# Altium PCB BioZ.PcbDoc (part 2 of 3)
Units mm, origin at the board's own origin, x right, y up, seen from the top; angles counter-clockwise.
Board outline 88 x 75 mm, 4 copper layers (Top Layer, GND1, GND 2, Bottom Layer), stack 1.564 mm thick; 175 components, 112 nets, 533 pads, 354 vias.
Unrouted connection lines stored in the file: 5.
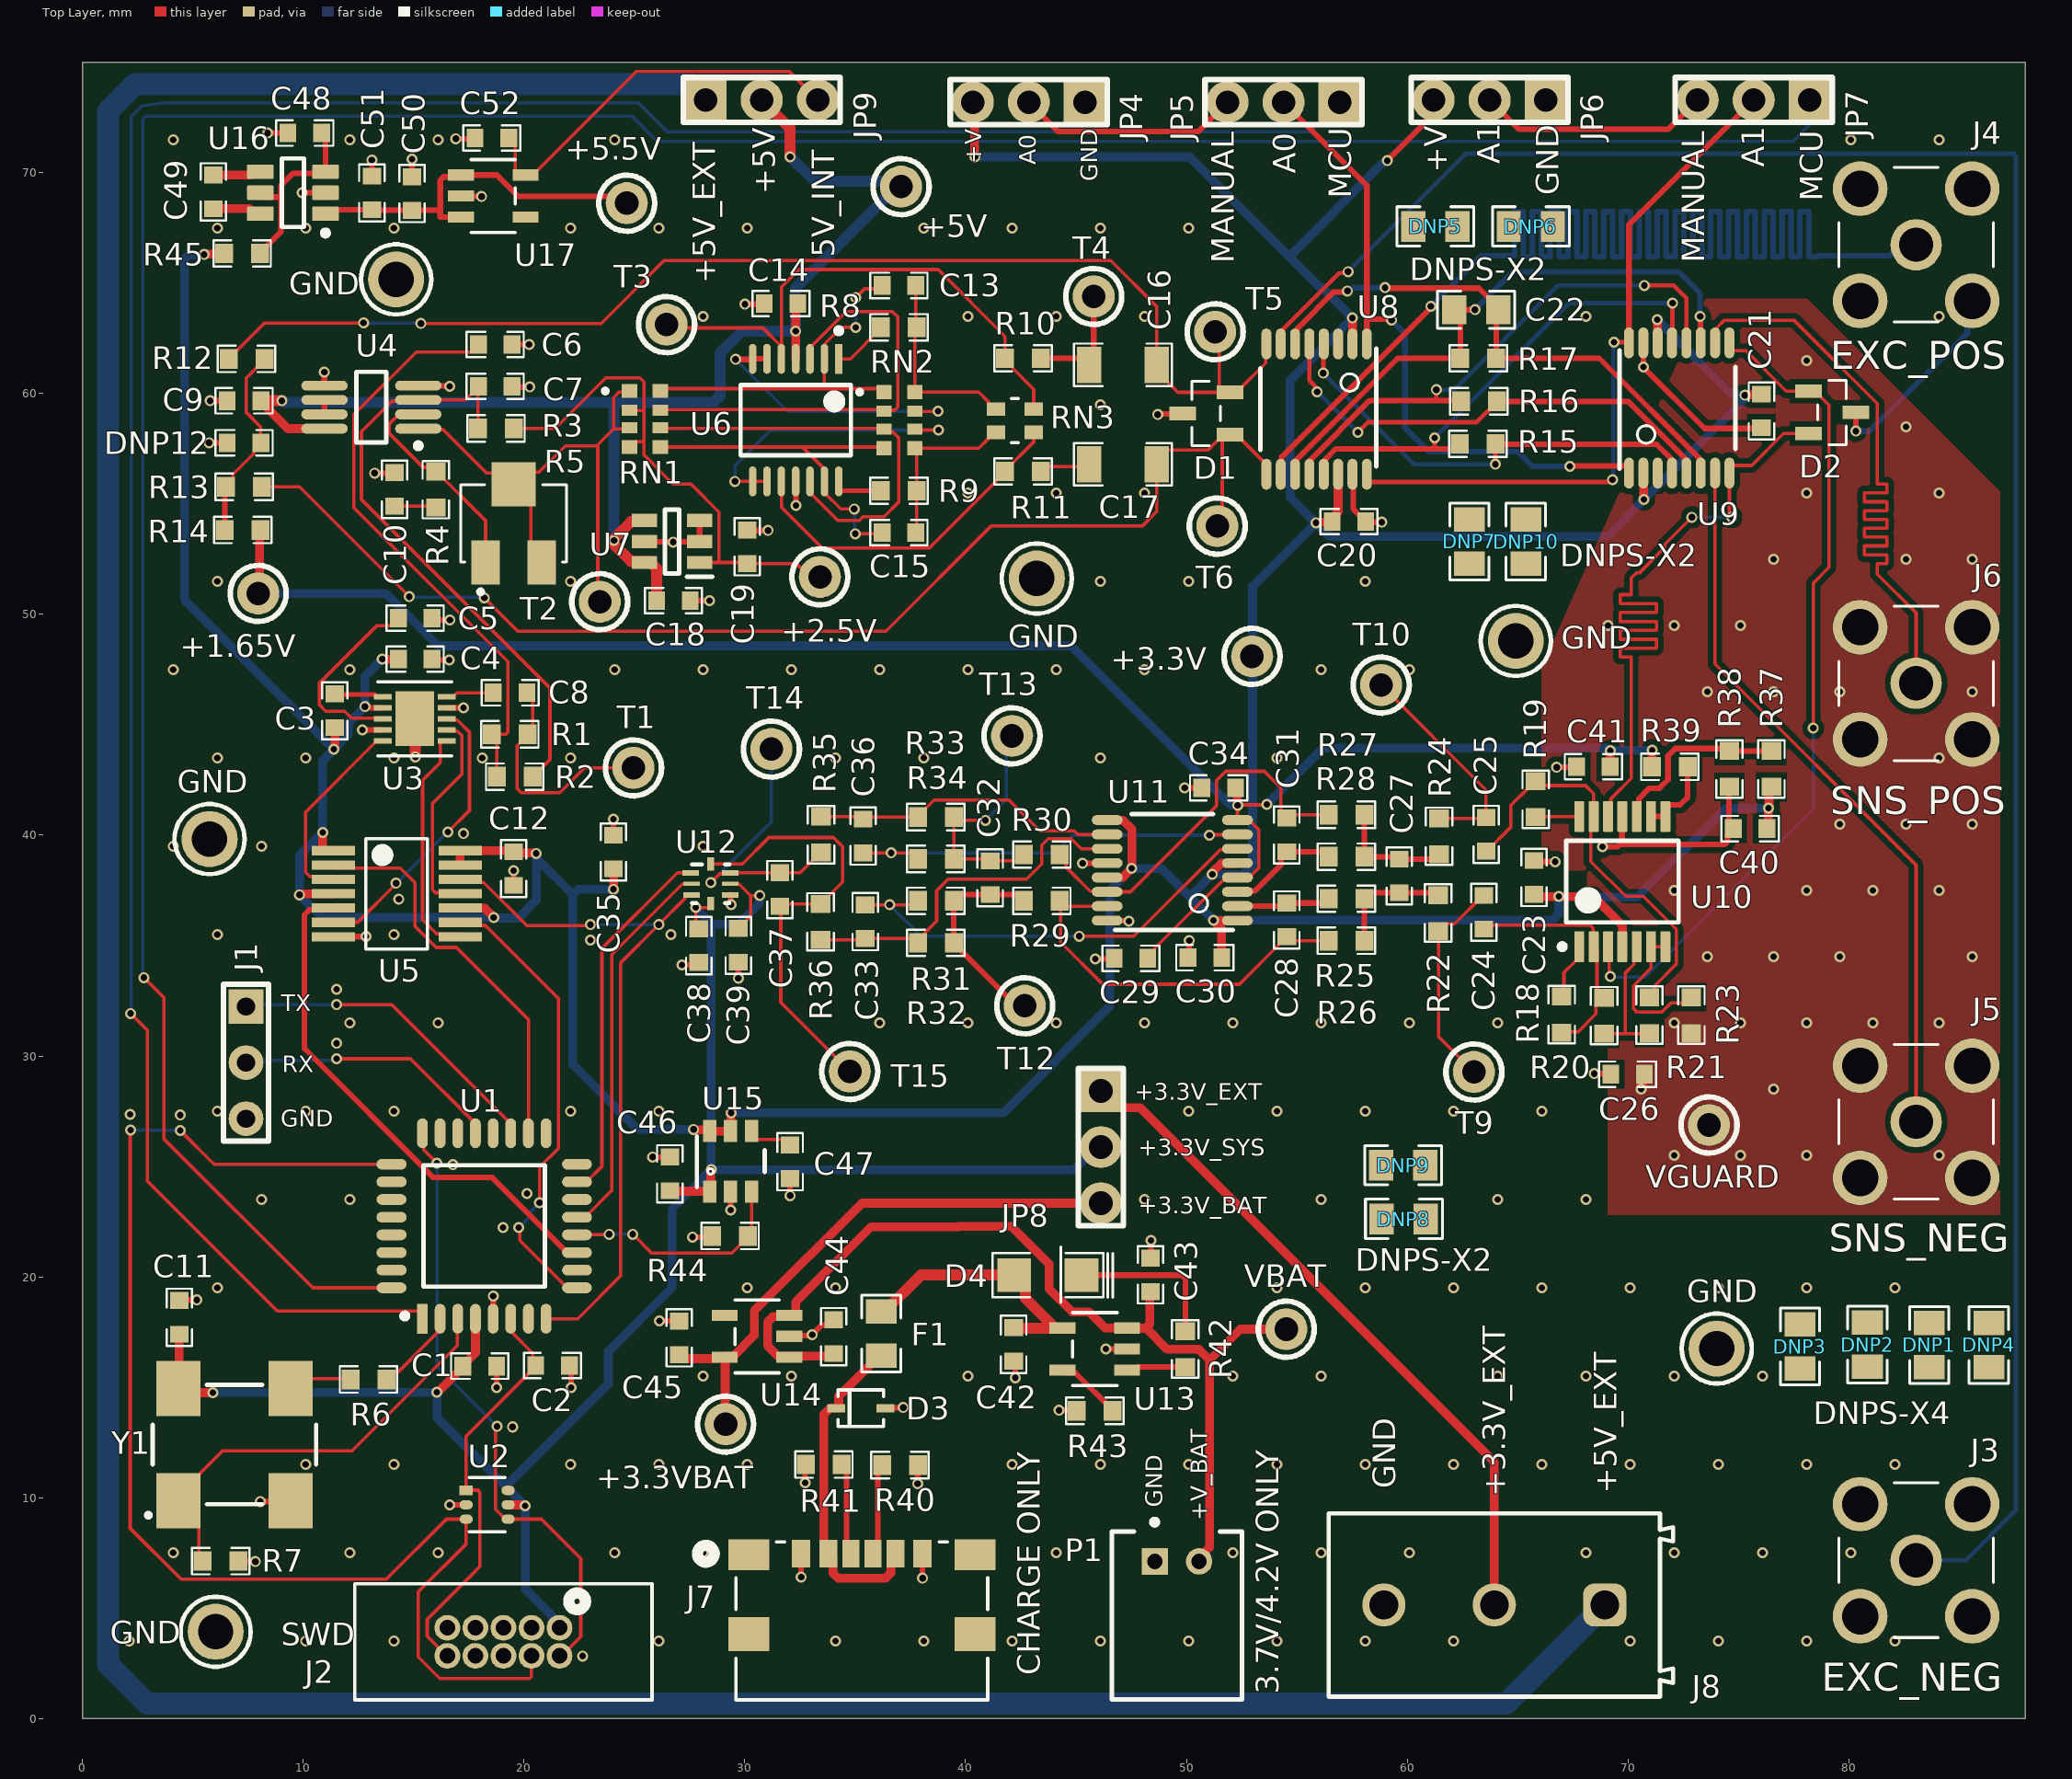
[diagram p0: Top Layer view]

## Via types
v1: diameter 0.5, hole 0.3, Top Layer to Bottom Layer, tented both sides, 354 vias

## Nets (pads, with @x,y where several pads share a name; then routed paths per layer and width w, separated by ;. In a path a pad name is that pad's centre, name@x,y a point inside that pad or via, vN(x,y) a via of type N, cw(c..) or ccw(c..) an arc to the next point about the centre after c; other vN are vias at no path point) (continued)
+3.3V: (continued)
  Bottom Layer w0.4: v1(5.5,66.3) 5.481,66.281 4.79,66.281 4.625,66.116 4.625,50.65 v1(11.375,43.9) ; v1(13.575,47.975) 12.787,47.187 v1(12.787,45.825) 12.025,45.063 12.025,44.55 v1(11.375,43.9) ; 20.55,37.057 19.744,36.251 18.667,36.251 18.648,36.271 v1(18.621,36.271) 10.854,36.271 v1(9.825,37.3) 9.825,39.075 v1(10.875,40.125) 10.875,43.373 11.375,43.873 v1(11.375,43.9) ; 20.55,37.125 v1@20.55,38.966 ; v1(20.55,39.175) v1@20.55,38.966 ; 22.434,37.55 22.2,37.316 ; 22.474,37.55 v1(24.05,37.55) ; v1(27.675,26.675) 25.15,26.675 22.2,29.625 22.2,37.316 ; v1(29.375,27.425) 41.7,27.425 46.525,32.25 46.525,37.275 46.546,37.296 46.546,37.521 v1(47.525,38.5) 47.544,38.481 48.894,38.481 50.075,37.3 ; v1(40.425,70.725) 50.15,70.725 54.663,66.213 ; v1@57.492,63.411 57.492,63.392 54.7,60.6 54.7,55.298 55.848,54.15 v1(55.875,54.15) ; v1(57.525,63.425) 56.122,64.828 56.047,64.828 54.663,66.213 ; v1(59.1,70.55) 59.033,70.55 58.91,70.427 58.877,70.427 54.663,66.213 ; v1(71.325,63.35) 74.731,59.944 75.281,59.944 v1(75.3,59.925) 75.281,59.906 75.281,59.756 v1(70.725,55.2) 69.05,53.525 56.5,53.525 v1(55.875,54.15) ; v1(76.375,41.225) 74.45,41.225 70.425,37.2 68.475,37.2 68.45,37.225 v1(66.875,37.225) 66.856,37.206 66.856,36.431 66.575,36.15 v1(51.225,36.15) 50.075,37.3 ; v1@20.55,38.966 22.2,37.316 ; 50.075,37.3 50.251,37.3 v1(51.174,38.222) 52.572,38.222 53,38.65 53,48.1 53,51.275 v1(55.875,54.15)
+3.3V_BAT: +3.3VBAT.1 C45.1 JP8.3 U14.5 | length 25.8
  Top Layer w0.4: C45.1@27.027,16.472 27.209,16.291 28.697,16.291 28.701,16.296 29.034,16.296 U14.5@29.088,16.35 ; +3.3VBAT.1@29.125,13.325 29.106,13.344 29.106,16.331 U14.5@29.088,16.35 ; JP8.3@46.125,23.335 35.31,23.335 30.426,18.451 30.426,17.357 29.474,16.404 29.142,16.404 U14.5@29.088,16.35
+3.3V_EXT: J8.2 JP8.1 | length 31.3
  Top Layer w0.4: JP8.1@46.125,28.415 46.878,27.662 47.902,27.662 63.95,11.614 J8.2@63.95,5.135
+3.3V_SYS: C1.1 C11.2 C38.1 C39.1 C46.1 J2.1 JP8.2 U1.4 U2.5 U12.4 U12.6 U15.1 Y1.4 | length 91.4
  Top Layer w0.15: C38.1@27.909,35.762 27.775,35.896 v1(27.775,36.725) 28.375,36.725 28.45,36.8 U12.4@28.45,36.9 ; U12.6@29.325,37.8 29.35,37.775 29.739,37.775 30.26,37.254 ; C39.1@29.7,35.775 29.738,35.775 30.044,36.081 30.044,36.119 30.26,36.335 30.26,37.254 ; v1(30.675,37.275) 30.654,37.254 30.26,37.254
  Top Layer w0.4: C11.2@4.375,17.401 4.375,14.98 4.605,14.75 v1(5.9,14.75) ; v1(16.05,14.775) 16.069,14.794 16.108,14.794 17.226,15.912 C1.1@17.226,15.95 17.226,15.988 17.793,16.555 U1.4@17.793,18.1 ; U2.5@19.275,9.675 19.279,9.671 19.977,9.671 20.023,9.625 v1(20.05,9.625) ; C46.1@26.6,23.901 26.625,23.876 28.374,23.876 U15.1@28.4,23.85 28.456,23.906 28.456,24.831 v1(28.475,24.85) ; C38.1@27.871,35.762 C38.1@27.909,35.762
  Bottom Layer w0.4: v1(5.9,14.75) 5.913,14.763 16.038,14.763 v1(16.05,14.775) 16.05,13.625 19.175,10.5 ; J2.1@21.6,4.1 21.6,4.298 20.05,5.848 v1(20.05,9.625) 19.175,10.5 ; v1@27.775,36.698 28.475,35.998 28.475,35.975 ; v1@28.475,24.877 28.475,35.975 ; v1(30.675,37.275) 30.656,37.256 30.656,36.906 29.725,35.975 28.475,35.975 ; JP8.2@46.125,25.875 45.941,25.875 44.916,24.85 v1(28.475,24.85) 26.7,23.075 26.7,19.494 23.815,16.61 23.815,15.14 19.175,10.5
+5.5V: +5.5V.1 C50.1 C51.1 U16.1 U17.1 U17.3 | length 17
  Top Layer w0.254: U16.1@11,68.15 11.175,68.325 C51.1@13.1,68.325 13.125,68.3 C50.1@14.925,68.3 16.2,68.3 ; U17.3@17.138,68 16.2,68 16.2,68.3 ; +5.5V.1@24.65,68.625 24.341,68.934 19.726,68.934 18.76,69.9 U17.1@17.138,69.9 17.055,69.818 16.349,69.818 16.2,69.669 16.2,68.3
+5V: +5V.1 C9.1 C14.1 C18.1 JP9.2 U4.8 U6.4 U7.4 U7.6 | length 61.8
  Top Layer w0.4: C9.1@8.074,59.675 8.074,59.637 9.298,58.413 U4.8@10.953,58.413 ; U6.4@32.3,61.575 v1(32.3,62.825) ; v1@32.3,62.852 32.3,63.976 C14.1@32.399,64.075
  Top Layer w0.5: C9.1@8.074,59.675 v1(9.025,59.675) ; U7.4@25.45,54.25 25.4,54.2 24.839,54.2 24.075,53.436 v1(24.075,53.35) 24.075,53.164 24.839,52.4 25.675,52.4 26.001,52.074 C18.1@26.001,50.625 ; JP9.2@30.76,73.3 32.05,72.01 v1(32.05,70.725)
  Bottom Layer w0.5: v1(9.025,59.675) 9.1,59.6 24.075,59.6 ; v1(24.075,53.35) 24.075,59.6 ; v1(32.05,70.725) 33.15,69.625 36.445,69.625 36.695,69.375 +5V.1@37.075,69.375 ; +5V.1@36.588,69.375 36.588,69.084 32.3,64.796 v1(32.3,62.825) 29.86,62.825 28.875,61.84 28.875,59.893 28.582,59.6 24.075,59.6
+5V_EXT: J8.1 JP9.1 | length 168.6
  Bottom Layer w1: JP9.1@28.22,73.3 27.509,74.011 2.371,74.011 1.15,72.789 1.15,2.45 2.929,0.671 64.486,0.671 J8.1@68.95,5.135